# EAGLE board TouchPad (EAGLE 6.4)
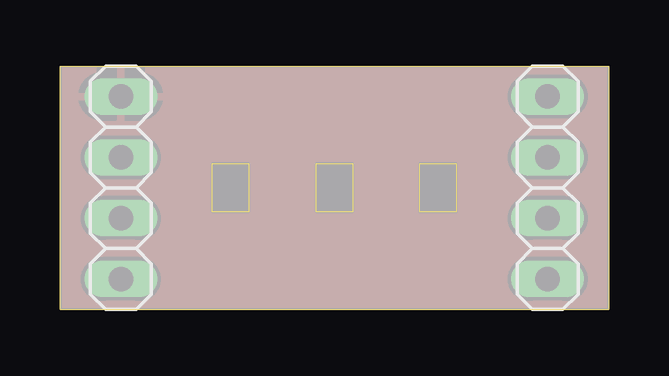
[diagram p0: board, top side]
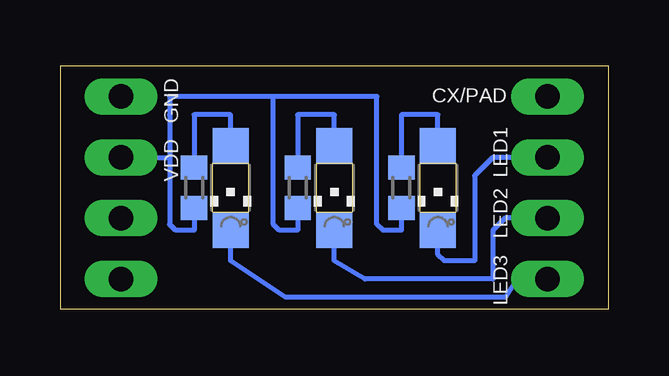
[diagram p1: board, bottom side, seen from below]

Size 22.86 x 10.16 mm. Coordinates in mm from the lower left corner, seen from the top.
Outline: 0,0 22.86,0 22.86,10.16 0,10.16 0,0
Outline: 6.35,6.1 7.87,6.1 7.87,4.06 6.35,4.06 6.35,6.1
Outline: 10.67,6.1 12.19,6.1 12.19,4.06 10.67,4.06 10.67,6.1
Outline: 14.99,6.1 16.51,6.1 16.51,4.06 14.99,4.06 14.99,6.1
Copper layers (1*16): Top 0.0356mm / dielectric 1.5011mm / Bottom 0.0356mm
Design rules "LaenPCBOrder *": minimum track width 6mil, minimum drill 13mil, track to track 6mil, track to pad 6mil, pad to pad 6mil, via to via 6mil, smd to smd 6mil, copper to edge 2mil, drill to drill 6mil, minimum pad ring 7mil, minimum via ring 7mil, stop-mask expansion 4mil, vias tented up to drill 0mil, thermal gap 10mil

## Footprints (pad centres in the part's own frame; a part is rotated, then mirrored left to right if it is on the bottom)
1X04 = drill 1.016 long: 1 -3.81,0; 2 -1.27,0; 3 1.27,0; 4 3.81,0
CHIPLED_1206 = smd 1.5 x 1.5: A 0,-1.75; C 0,1.75
R0603 = smd 1 x 1.1: 1 -0.85,0; 2 0.85,0

## Placement (x,y rotation side)
JP3  [1X04]  20.32,5.08 90 top
JP4  [1X04]  2.54,5.08 90 top
LED1  [CHIPLED_1206]  15.75,5.08 180 bottom
LED2  [CHIPLED_1206]  11.43,5.08 180 bottom
LED3  [CHIPLED_1206]  7.11,5.08 180 bottom
R1  470R  [R0603]  17.27,5.08 270 bottom
R2  470R  [R0603]  12.95,5.08 270 bottom
R3  470R  [R0603]  8.64,5.08 270 bottom

## Library data of the parts
JP3 JP4 = pinhead
LED1-LED3 R1-R3 = adafruit

## Nets
N$3: LED1.A R1.1
N$4: LED2.A R2.1
N$5: LED3.A R3.1
N$9: JP4.1 LED1.C
N$10: JP4.2 LED2.C
N$11: JP4.3 LED3.C
TOUCHPAD: JP4.4
VDDHI: JP3.3 R1.2 R2.2 R3.2

## Tracks (layer width: path | path; a pad name or v marks a point on that pad's centre or on a via)
N$3
  Bottom 0.203: LED1.A 15.75,8.13 17.27,8.13 R1.1
N$4
  Bottom 0.203: LED2.A 11.43,8.13 12.95,8.13 R2.1
N$5
  Bottom 0.203: LED3.A 7.11,8.13 8.64,8.13 R3.1
N$9
  Bottom 0.203: JP4.1 3.81,1.27 4.32,0.51 13.46,0.51 15.75,2.03 LED1.C
N$10
  Bottom 0.203: JP4.2 4.32,3.81 4.83,3.3 4.83,1.27 10.16,1.27 11.43,2.03 LED2.C
N$11
  Bottom 0.203: JP4.3 4.83,6.35 5.59,5.59 5.59,2.03 6.86,2.03 7.11,2.29 LED3.C
TOUCHPAD
  pour Top: 0,0 0,10.16 22.86,10.16 22.86,0
VDDHI
  Bottom 0.203: R3.2 8.64,3.3 9.4,3.3 9.65,3.56 9.65,8.89 13.97,8.89 | 13.97,8.89 17.53,8.89 18.29,8.89 18.29,8.13 18.29,6.35 | 18.29,6.35 18.29,3.56 18.03,3.3 17.27,3.3 R1.2 | R2.2 12.95,3.3 13.72,3.3 13.97,3.56 13.97,8.89 | JP3.3 18.29,6.35

## Text on the board
bPlace: GND | CX/PAD | LED1 | VDD | LED2 | LED3